# Altium PCB scheme.PcbDoc
Units mm, origin at the board's own origin, x right, y up, seen from the top; angles counter-clockwise.
Board outline 100 x 62 mm, 2 copper layers (Top Layer, Top, Bottom Layer, Bottom); 18 components, 15 nets, 46 pads, 0 vias.
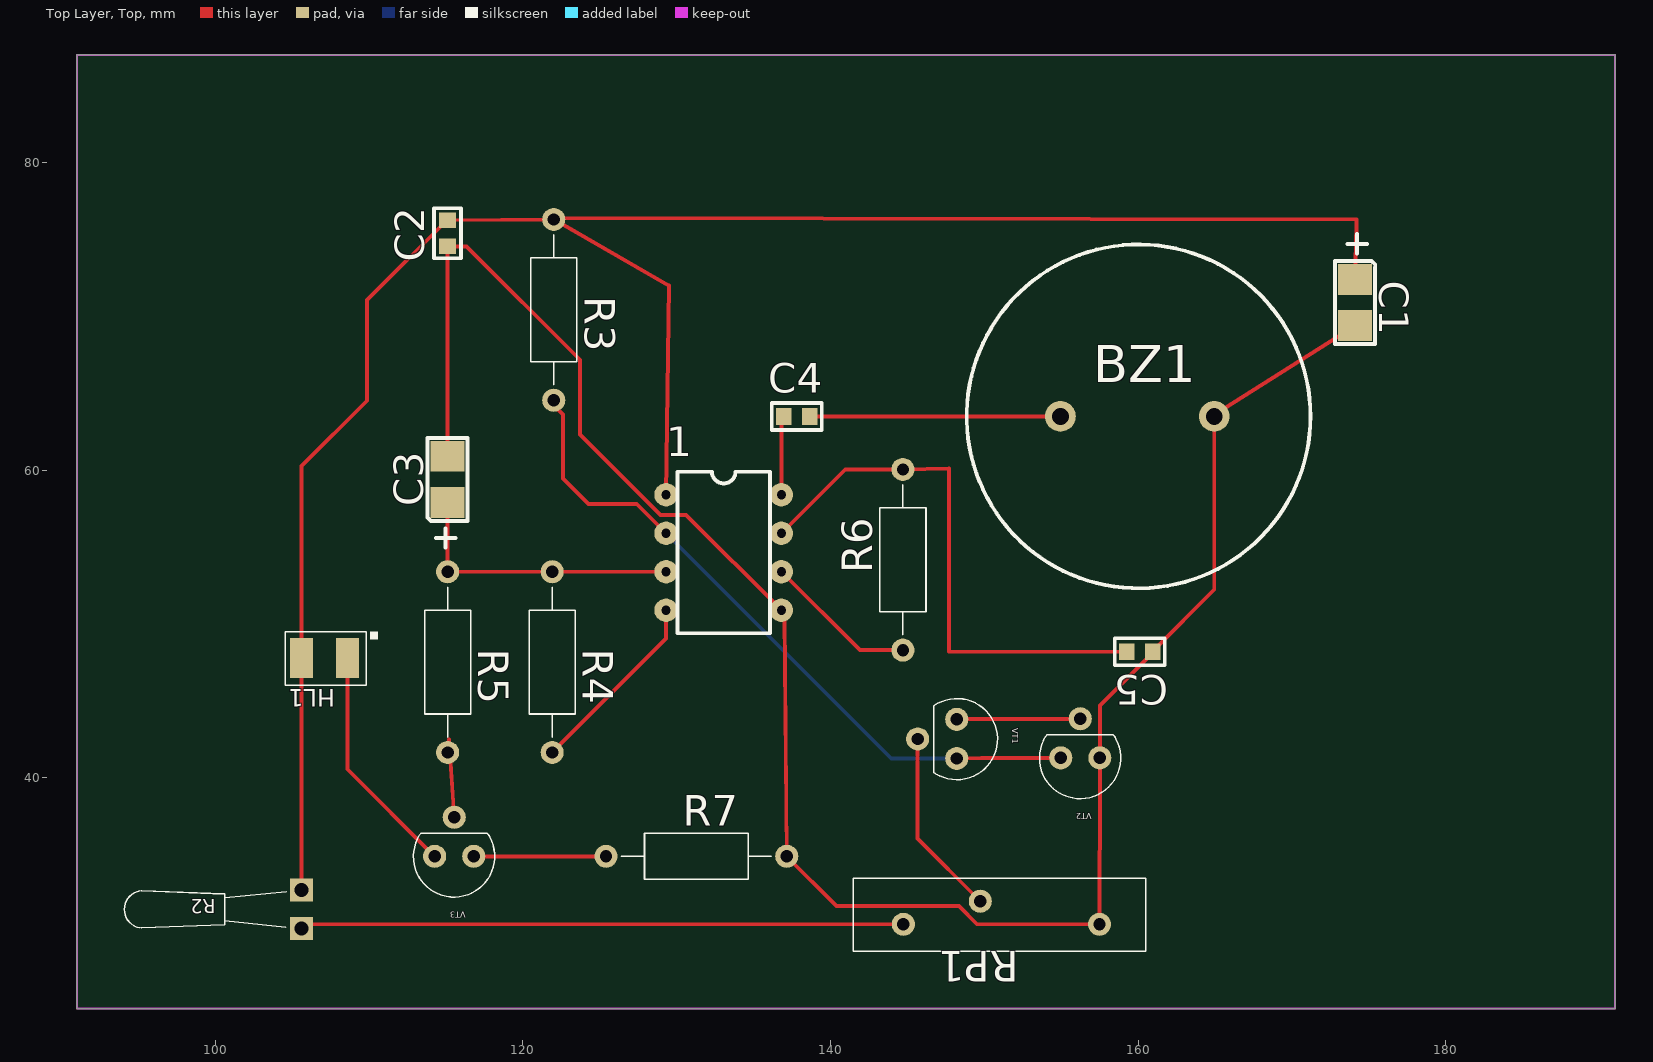
[diagram p0: Top Layer, Top view]
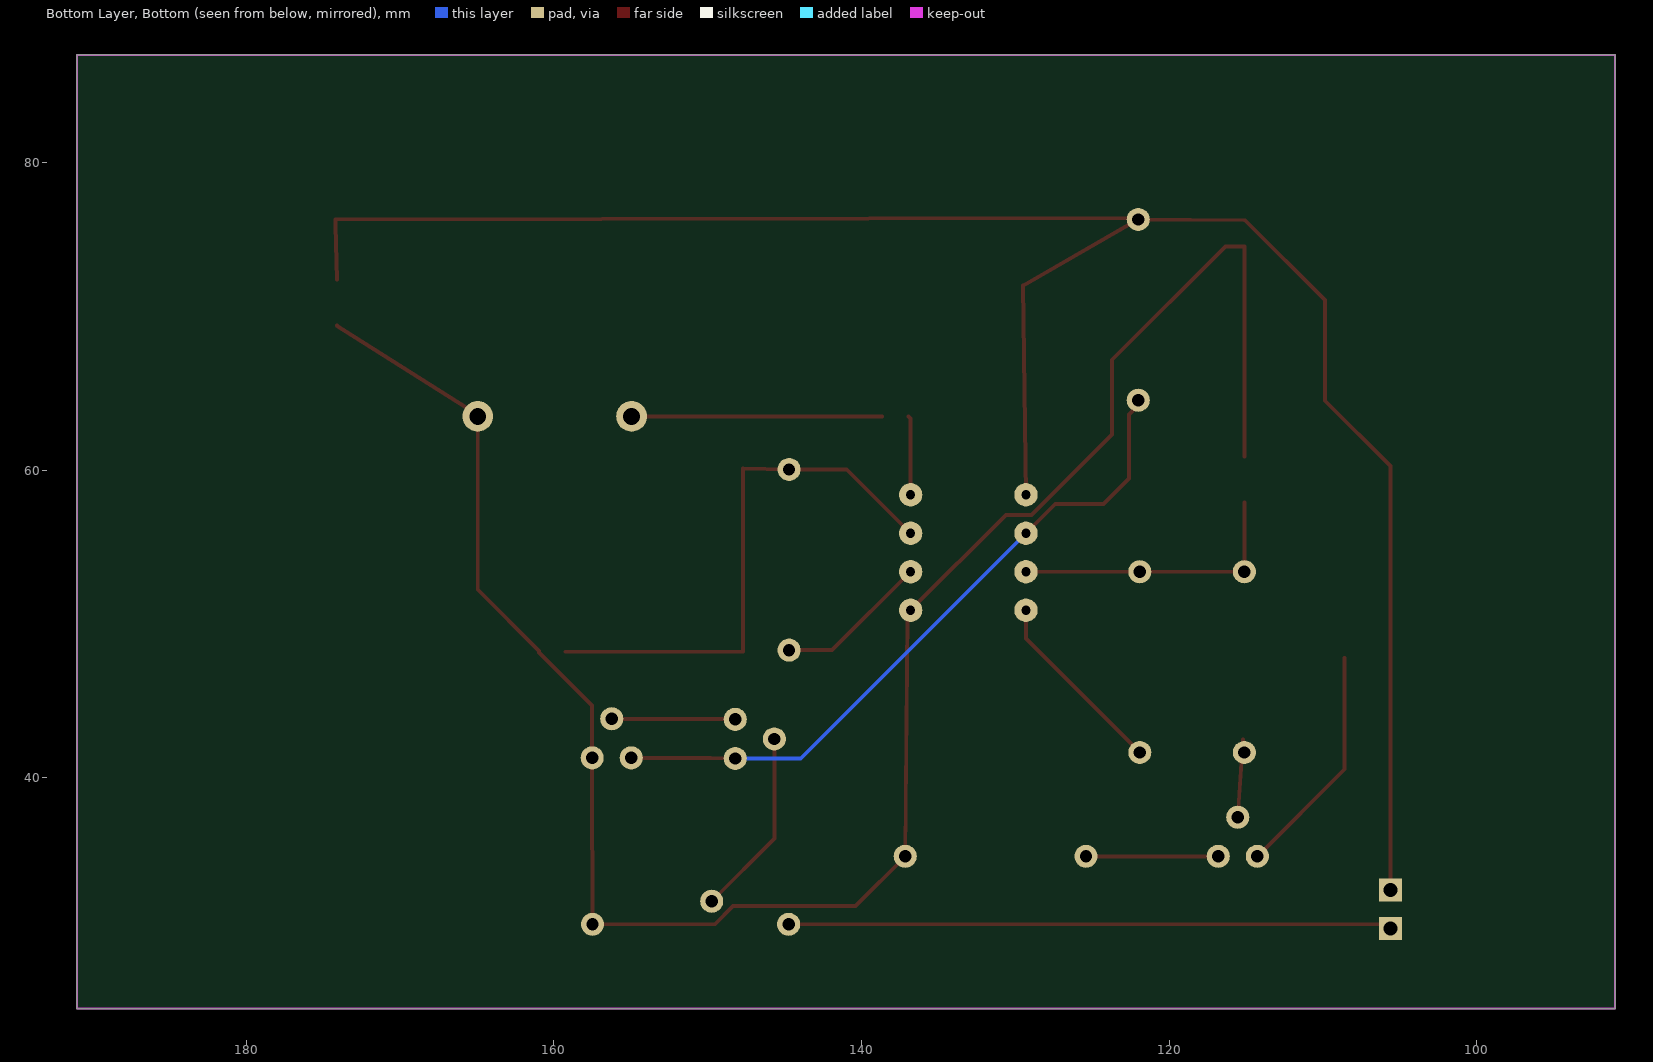
[diagram p1: Bottom Layer, Bottom view, seen from below]

## Layer stack, top to bottom
Top Solder, Top Mask: solder mask 0.0102, Solder Resist, Dk 3.5
Top Layer, Top: signal copper 0.0356
Dielectric 1: dielectric 0.32, FR-4, Dk 4.8
Bottom Layer, Bottom: signal copper 0.0356
Bottom Solder, Bot Mask: solder mask 0.0102, Solder Resist, Dk 3.5

## Board outline
91,25 191,25 191,87 91,87

## Design rules (kind name [scope] priority, off if disabled: settings)
Clearance [All] p1: gap=0.254 ignorepadtopadclearanceinfootprint=FALSE except(0: Arc-Hole Track-Hole SMDPad-Hole THPad-Hole Via-Hole Fill-Hole Poly-Hole Region-Hole Text-Hole; 0.3: Arc-Arc Arc-Track Arc-THPad Arc-Via Track-Track Track-THPad Track-Via THPad-THPad THPad-Via Via-Via)
PlaneClearance [All] p1: clearance=0.254
PolygonConnect [All] p1: connectstyle=Relief reliefconductorwidth=0.254 reliefentries=4 polygonreliefangle="90 Angle" airgapwidth=0.254
RoutingVias [All] p1: holewidth=0.711 width=1.27 viastyle="Through Hole" minholewidth=0.711 minwidth=1.27 maxholewidth=0.711 maxwidth=1.27
SolderMaskExpansion [All] p1: expansion=0.102 istentingtop=FALSE
Width [All] p1: maxlimit=3 minlimit=0.254 preferedwidth=0.254 minimp=50.000000 maximp=50.000000 favimp=50.000000
29 further rules are at their usual default settings.

## Components (designator, comment, footprint, x,y, rotation, side; value= is the part's Value field where it differs from the comment)
1 "" KP1436AP1 129.3,58.4 r0 top
BZ1 "" ZUM1 154.94,63.5 r0 top
C1 "" CE3528-B 174.1,70.9 r270 top
C2 "" CC0603 115.1,75.4 r90 top
C3 "" CE3528-B 115.1,59.4 r90 top
C4 "" CC0603 137.8,63.5 r0 top
C5 "" CC0603 160.1,48.2 r180 top
HL1 "{Value}" 3528_3528(Primary) 108.6,47.8 r180 top
R2 "" B57861 105.6,30.2 r90 top
R3 "" C2-33H-0.25W 122,76.3 r270 top
R4 "" C2-33H-0.25W 121.9,53.4 r270 top
R5 "" C2-33H-0.25W 115.1,53.4 r270 top
R6 "" C2-33H-0.25W 144.7,48.3 r90 top
R7 "" C2-33H-0.25W 125.4,34.9 r0 top
RP1 "" 3006P 157.48,30.48 r180 top
VT1 "" TO-92-1 148.2,43.8 r270 top
VT2 "" TO-92-1 157.5,41.3 r180 top
VT3 "" TO-92-1 116.8,34.9 r180 top

## Footprints (in the part's own frame and the unit in brackets; to place one, negate y for a bottom-side part, rotate by r counter-clockwise, add the part's x,y. Pads: shape width x height; smd on the part's side, far side on the other; paste and mask are expansions set on the pad)
3006P [mm]
  round 1.5 hole 0.8: 1(0,0) 2(7.75,-1.5) 3(12.75,0)
  silkscreen extent -3,-3 16,1.75
3528_3528(Primary) [mm]
  rect 1.5x2.6 smd: A(3,0) K(0,0)
  silkscreen extent -1.96,-1.71 4.04,1.79
B57861 [mm]
  rect 1.5x1.5 hole 0.9: 1(0,0) 2(2.5,0)
  silkscreen extent 0.05,0.98 2.45,11.52
C2-33H-0.25W [mm]
  round 1.5 hole 0.8: 1(0,0) 2(11.75,0)
  silkscreen extent 1,-1.5 10.75,1.5
CC0603 [mm]
  rect 1x1.1 smd: 1(-0.85,0) 2(0.85,0)
  silkscreen extent -1.63,-0.87 1.63,0.87
CE3528-B [mm]
  rect 2x2.2 smd: 1(-1.5,0) 2(1.5,0)
  silkscreen extent -4.44,-1.3 2.7,1.3
KP1436AP1 [mm]
  round 1.524 hole 0.6: 1(0,0) 2(0,-2.5) 3(0,-5) 4(0,-7.5) 5(7.5,-7.5) 6(7.5,-5) 7(7.5,-2.5) 8(7.5,0)
  silkscreen extent 0.75,-9 6.75,1.5
TO-92-1 [mm]
  round 1.5 hole 0.8: 1(0,0) 2(1.27,-2.54) 3(2.54,0)
  silkscreen extent -1.35,-1.5 3.92,2.65
ZUM1 [mm]
  round 2 hole 1.1: 1(0,0) 2(10,0)
  silkscreen extent -6.09,-11.18 16.26,11.18

## Nets (pads, with @x,y where several pads share a name; then routed paths per layer and width w, separated by ;. In a path a pad name is that pad's centre, name@x,y a point inside that pad or via, vN(x,y) a via of type N, cw(c..) or ccw(c..) an arc to the next point about the centre after c; other vN are vias at no path point)
+12B: 1.1 C1.1 C2.2 HL1.A R2.2 R3.1 | length 132.8
  Top Layer, Top w0.254: R2.2 HL1.A 105.6,60.261 109.855,64.516 109.855,71.055 115.05,76.25 C2.2 R3.1 ; 1.1 129.5,72 R3.1 ; C1.1 174.2,75.9 174.2,76.3 122.2,76.4 R3.1
GND: 1.5 BZ1.2 C1.2 C2.1 C3.2 C5.1 R7.2 RP1.1 VT2.1 | length 133.2
  Top Layer, Top w0.254: C3.2 C2.1 116.331,74.55 123.698,67.183 123.698,62.321 128.93,57.089 130.611,57.089 1.5 137,50.6 R7.2 140.393,31.657 148.348,31.657 149.525,30.48 RP1.1 157.5,40.1 VT2.1 157.5,44.7 160.95,48.15 C5.1 160.95,48.25 164.94,52.24 BZ1.2 165.1,63.7 C1.2
NET00000: R2.1 RP1.3 | length 39.3
  Top Layer, Top w0.254: R2.1 105.88,30.48 RP1.3 RP1.3@144.78,30.48
NET00001: 1.8 C4.1 | length 5.2
  Top Layer, Top w0.254: 1.8 136.8,63.35 C4.1
NET00003: 1.4 R4.2 | length 12.3
  Top Layer, Top w0.254: R4.2 129.3,49.05 1.4
NET00004: RP1.2 VT1.2 | length 12.2
  Top Layer, Top w0.254: VT1.2 145.66,36.05 RP1.2
NET00005: VT1.1 VT2.2 | length 8
  Top Layer, Top w0.254: VT1.1 148.22,43.82 156.21,43.82 VT2.2
NET00006: 1.2 R3.2 VT1.3 VT2.3 | length 45.2
  Top Layer, Top w0.254: R3.2 122,64.213 122.598,63.615 122.598,59.458 124.255,57.8 127.4,57.8 1.2 ; VT1.3 149.8,41.3 VT2.3
  Bottom Layer, Bottom w0.254: 1.2 143.94,41.26 VT1.3
NET00007: HL1.K VT3.3 | length 15.2
  Top Layer, Top w0.254: HL1.K 108.6,40.56 VT3.3
NET00008: R7.1 VT3.1 | length 8.6
  Top Layer, Top w0.254: VT3.1 R7.1
NET00009: BZ1.1 C4.2 | length 16.3
  Top Layer, Top w0.254: C4.2 BZ1.1
NET00010: 1.6 R6.1 | length 10
  Top Layer, Top w0.254: 1.6 141.9,48.3 R6.1
NET00011: 1.7 C5.2 R6.2 | length 36.1
  Top Layer, Top w0.254: 1.7 140.95,60.05 R6.2 147.7,60.1 147.7,48.2 C5.2
NET00012: R5.2 VT3.2 | length 5.9
  Top Layer, Top w0.254: R5.2 115.2,42.5 VT3.2
NET00013: 1.3 C3.1 R4.1 R5.1 | length 18.7
  Top Layer, Top w0.254: C3.1 R5.1 R4.1 1.3

## Keep-outs
Keep-Out Layer, Board:
  the board outline again, w0.127

## Text inside footprints (layer, text, board x,y; h text height)
VT1: Mechanical 1, Top Assy "C" at 148.99,41.51 h0.31 r270; Mechanical 1, Top Assy "E" at 148.99,44.51 h0.31 r270; Mechanical 1, Top Assy "BASE" at 146.95,43.05 h0.31 r270
VT2: Mechanical 1, Top Assy "C" at 155.21,40.51 h0.31 r180; Mechanical 1, Top Assy "E" at 158.21,40.51 h0.31 r180; Mechanical 1, Top Assy "BASE" at 156.75,42.55 h0.31 r180
VT3: Mechanical 1, Top Assy "C" at 114.51,34.11 h0.31 r180; Mechanical 1, Top Assy "E" at 117.51,34.11 h0.31 r180; Mechanical 1, Top Assy "BASE" at 116.05,36.15 h0.31 r180